# Altium PCB Sensor_Box_Ethernet.PCBDOC
Units mil, origin at the board's own origin, x right, y up, seen from the top; angles counter-clockwise.
Board outline 895.86 x 2876.17 mil, 2 copper layers (Top, Bot), stack 61.855 mil thick; 45 components, 45 nets, 170 pads, 79 vias.
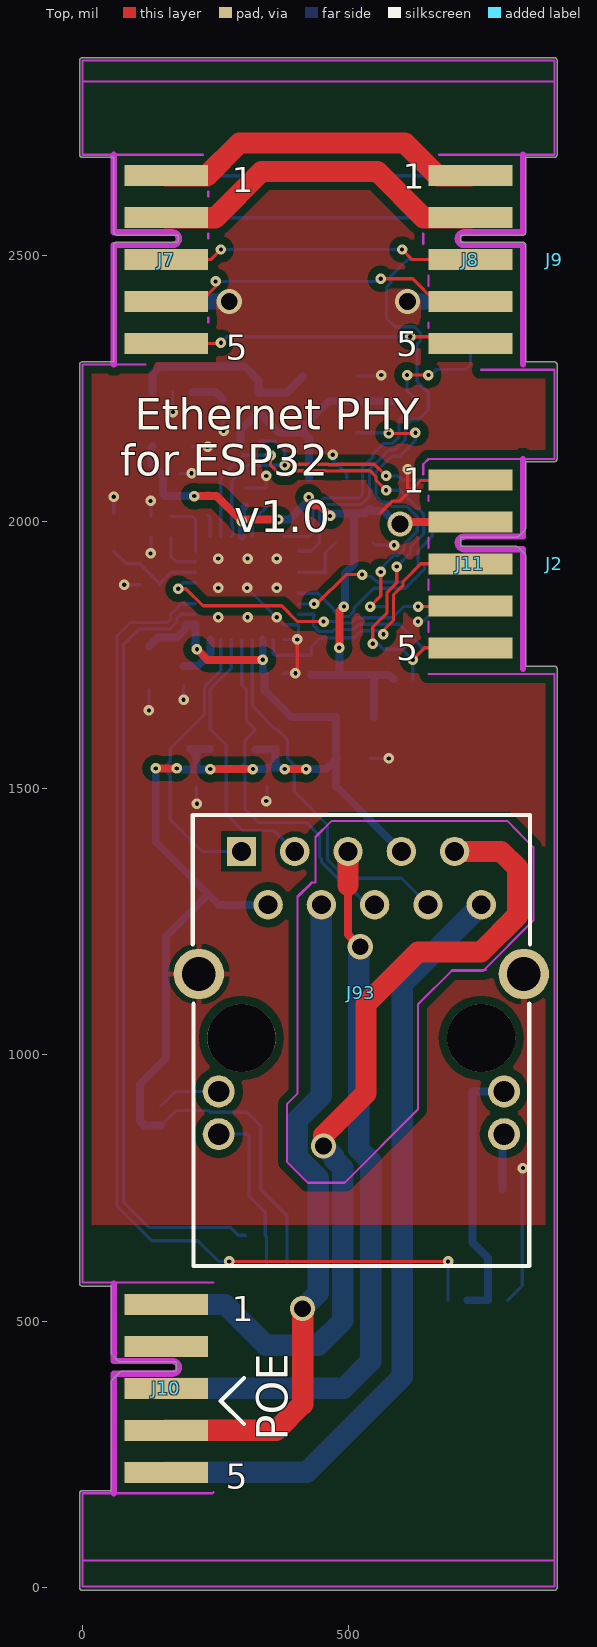
[diagram p0: Top view]
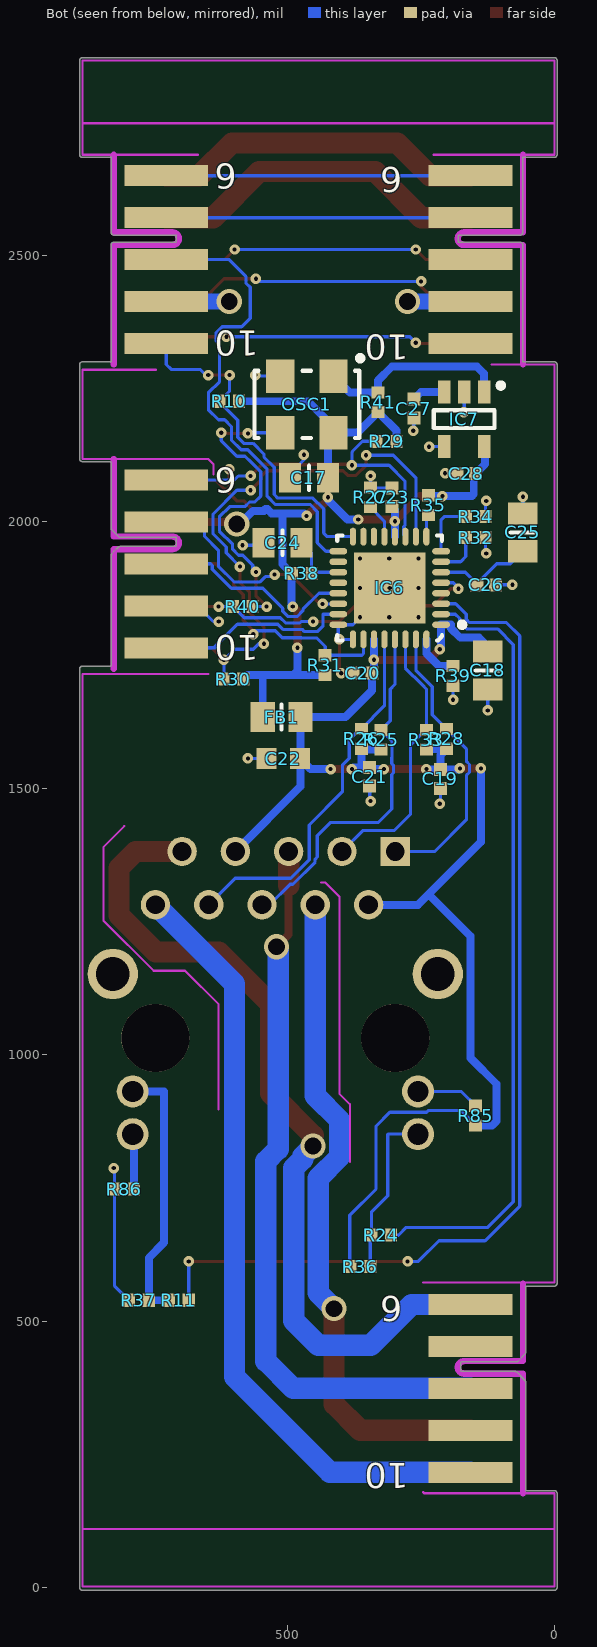
[diagram p1: Bot view, seen from below]
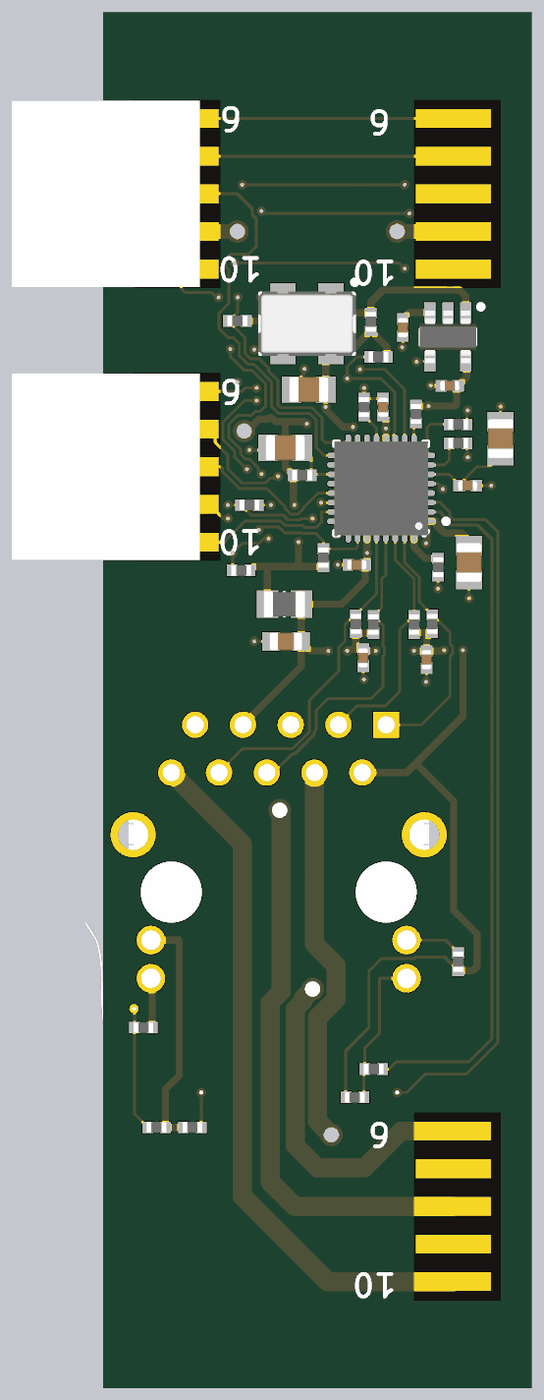
[diagram p2: 3D render of the assembled board from below, using the file's embedded part models]

## Layer stack, top to bottom
TopSolder: solder mask 0.4, Solder Resist, Dk 3.5
Top: signal copper 1.4
Dielectric1: core 59.0551, FR-4, Dk 4.8
Bot: signal copper 1.4
BottomSolder: solder mask 0.4, Solder Resist, Dk 3.5

## Board outline
-4.92,-0.98 cw(c0,0) -5.02,0 -5.02,177.17 cw(c0,177.17) 0,182.18 54.04,182.18 54.04,385.83 cw(c59.05,385.83) 55.53,389.39 55.51,389.37 71.26,405.12 71.24,405.1 cw(c74.8,401.58) 74.8,406.59 176.09,406.59 176.09,424.12 70.87,424.12 cw(c70.87,429.13) 67.3,425.61 67.32,425.59 55.51,437.4 55.53,437.38 cw(c59.05,440.95) 54.04,440.95 54.04,565.85 0,565.85 cw(c0,570.87) -5.02,570.87 -5.02,1724.41 -5.02,2295.27 cw(c0,2295.27) 0,2300.29 59.06,2300.29 59.06,2519.68 cw(c64.07,2519.68) 64.07,2524.7 180.02,2524.7 180.02,2538.29 64.07,2538.29 cw(c64.07,2543.31) 59.06,2543.31 59.06,2683.96 0,2683.96 cw(c0,2688.97) -5.02,2688.97 -5.02,2866.14 cw(c0,2866.14) 0,2871.16 885.83,2871.16 cw(c885.83,2866.14) 890.84,2866.14 890.84,2688.97 cw(c885.83,2688.97) 885.83,2683.96 831.79,2683.96 831.79,2543.31 cw(c826.77,2543.31) 826.77,2538.29 709.74,2538.29 709.74,2524.7 826.77,2524.7 cw(c826.77,2519.69) 831.79,2519.69 cw(c826.77,2519.69) 831.79,2519.64 831.79,2300.29 885.83,2300.29 cw(c885.83,2295.27) 890.84,2295.27 890.84,2118.11 cw(c885.83,2118.11) 885.83,2113.09 831.79,2113.09 831.79,1988.19 cw(c826.77,1988.19) 830.3,1984.62 830.32,1984.64 818.51,1972.83 818.52,1972.85 cw(c814.96,1976.38) 814.96,1971.36 709.74,1971.36 709.74,1953.83 814.96,1953.83 cw(c814.96,1948.82) 818.52,1952.35 818.51,1952.36 826.4,1944.47 830.32,1940.55 830.3,1940.57 cw(c826.77,1937.01) 831.79,1937.01 831.79,1729.42 885.83,1729.42 cw(c885.83,1724.41) 890.84,1724.41 890.84,0 cw(c885.83,0) 885.83,-5.02 0,-5.02 cw(c0,0)

## Design rules (kind name [scope] priority, off if disabled: settings)
Clearance Clearance_DIFF [(InDifferentialPairClass('All Differential Pairs'))] p1: gap=5 ignorepadtopadclearanceinfootprint=FALSE except(0: Arc-Hole Track-Hole SMDPad-Hole THPad-Hole Via-Hole Fill-Hole Poly-Hole Region-Hole Text-Hole; 10: Arc-Poly Track-Poly SMDPad-Poly THPad-Poly Via-Poly Fill-Poly Poly-Poly Poly-Region Poly-Text)
Clearance [All] p2: gap=6 ignorepadtopadclearanceinfootprint=FALSE except(15: Arc-Poly Track-Poly SMDPad-Poly THPad-Poly Via-Poly Fill-Poly Poly-Poly)
DiffPairsRouting [All] p1: maxlimit=10 minlimit=5 mostfreqgap=5 toplayer_minwidth=5 toplayer_maxwidth=15 toplayer_prefwidth=10 bottomlayer_minwidth=5 bottomlayer_maxwidth=15 bottomlayer_prefwidth=10 maxuncoupledlength=500
FabricationTestPointUsage TestPointUsage [All] p1: valid=0 allowmultiple=FALSE
FabricationTestpoint Testpoint [All] p1: side=3 testpointundercomponent=TRUE minsize=40 maxsize=100 preferedsize=60 minholesize=20 maxholesize=40 preferedholesize=32 testpointgrid=1 allowsidetop=TRUE allowsidebottom=TRUE usegrid=TRUE gridtolerance=0.01
HoleSize [All] p1: absolutevalues=TRUE maxlimit=150 minlimit=1 maxpercent=80.000 minpercent=20.000
HoleToHoleClearance [All] p1: gap=1 allowstackedmicrovias=TRUE
MinimumSolderMaskSliver [All] p1: minsoldermaskwidth=0
PlaneClearance [All] p1: clearance=10
PlaneConnect [All] p1: planeconnectstyle=Direct reliefexpansion=20 reliefentries=4 reliefconductorwidth=10 reliefairgap=10
PolygonConnect PolygonConnect_pad [(InPadClass('All Pads'))] p1: connectstyle=Relief reliefconductorwidth=10 reliefentries=4 polygonreliefangle="90 Angle" airgapwidth=10
PolygonConnect [All] p2: connectstyle=Direct reliefconductorwidth=10 reliefentries=4 polygonreliefangle="45 Angle" airgapwidth=10
RoomDefinition Sensor_Box_Ethernet [InComponentClass('Sensor_Box_Ethernet')] p1 off: confinementstyle=ConfineIn formatcopy=TRUE lockcomponents=FALSE outline 1718.49,25.58 8913.36,25.58 8913.36,960.61 1718.49,960.61
RoutingVias [All] p1: holewidth=7.87 width=19.68 viastyle="Through Hole" minholewidth=7.87 minwidth=19.68 maxholewidth=28 maxwidth=50
SilkToSilkClearance [All] p1: silktosilkclearance=0
SilkToSolderMaskClearance SilkscreenOverComponentPads [IsPad] p1: minsilkscreentomaskgap=0 clearancetoexposedcopper=TRUE
SolderMaskExpansion [All] p1: expansion=2
Width [All] p1: maxlimit=50 minlimit=5 preferedwidth=5
20 further rules are at their usual default settings.

## Classes and differential pairs
differential pair PHY_TD: +PHY_TD_P -PHY_TD_N
differential pair PHY_RD: +PHY_RD_P -PHY_RD_N

## Components (designator, comment, footprint, x,y, rotation, side; value= is the part's Value field where it differs from the comment)
C17 "10uF" CAPC2012X135N 460.63,2082.68 r0 bottom
C18 "10uF" CAPC2012X135N 125,1721.14 r270 bottom
C19 "100nF" CAPC1005X55N 213.94,1517.83 r90 bottom
C20 "100nF" CAPC1005X55N 360,1716.14 r180 bottom
C21 "100nF" CAPC1005X55N 346.61,1521.77 r270 bottom
C22 "10nF" CAPC1608X87N 508.62,1555.75 r180 bottom
C23 "100nF" CAPC1005X55N 305,2046.14 r270 bottom
C24 "10uF" CAPC2012X135N 510,1961.14 r180 bottom
C25 "10uF" CAPC2012X135N 59.06,1980.31 r90 bottom
C26 "100nF" CAPC1005X55N 127.95,1881.89 r0 bottom
C27 "100nF" CAPC1005X55N 263.78,2212.6 r90 bottom
C28 "100nF" CAPC1005X55N 165.35,2090.55 r180 bottom
FB1 "220R@100MHz" INDC2012X105N 511.81,1633.86 r0 bottom
IC6 "LAN8710A-EZC" QFN50P500X500X100-33N-S340 309.06,1875.98 r0 bottom
IC7 "BD5230FVE-TR" SOT95P280X145-5N 169.29,2192.91 r270 bottom
J2 "=Family" "AVX_00 9159 010 061 916" 885.83,1921.26 r180 top
J7 "=Family" EDGE10T1B6_P200W1000L0F100X400 157.48,2649.61 r270 top locked
J8 "=Family" EDGE10T5B10_P200W1000L0F100X400 728.35,2334.64 r90 top locked
J9 "=Family" "AVX_00 9159 010 061 916" 885.83,2492.13 r180 top locked
J10 "=Family" EDGE10T1B6_P200W1000L0F100X400 157.48,531.5 r270 top locked
J11 "=Family" EDGE10T5B10_P200W1000L0F100X400 728.35,1763.78 r90 top locked
J93 "RJ45" ABRACON_ARJM11C7-114-BA-EW2 523.62,1031.5 r0 top locked
OSC1 "50MHz" OSCSC254P320X500X130-4N 464.57,2220.47 r270 bottom
R10 "10k" RESC1005X40N 610.24,2226.38 r180 bottom
R11 "330" RESC1005X40N 704.72,539.37 r0 bottom
R24 "330" RESC1005X40N 324.8,661.42 r0 bottom
R25 "49R9" RESC1005X40N 325,1591.14 r90 bottom
R26 "49R9" RESC1005X40N 362.36,1592.64 r90 bottom
R27 "10k" RESC1005X40N 345,2046.14 r90 bottom
R28 "49R9" RESC1005X40N 202.13,1592.64 r270 bottom
R29 "10k" RESC1005X40N 315,2151.14 r180 bottom
R30 "10k" RESC1005X40N 602.36,1704.72 r180 bottom
R31 "10k" RESC1005X40N 430,1731.14 r270 bottom
R32 "10k" RESC1005X40N 147.64,1970.47 r180 bottom
R33 "49R9" RESC1005X40N 240,1591.14 r270 bottom
R34 "10k" RESC1005X40N 147.64,2009.84 r180 bottom
R35 "10k" RESC1005X40N 236.22,2031.5 r90 bottom
R36 "10k" RESC1005X40N 364.17,602.36 r0 bottom
R37 "10k" RESC1005X40N 779.53,539.37 r0 bottom
R38 "10k" RESC1005X40N 474.41,1903.54 r0 bottom
R39 "12k1" RESC1005X40N 190,1711.14 r90 bottom
R40 "10" RESC1005X40N 585,1841.14 r0 bottom
R41 "10k" RESC1005X40N 330.71,2224.41 r90 bottom
R85 "330" RESC1005X40N 147.64,885.83 r90 bottom
R86 "330" RESC1005X40N 807.09,748.03 r180 bottom

## Footprints (in the part's own frame and the unit in brackets; to place one, negate y for a bottom-side part, rotate by r counter-clockwise, add the part's x,y. Pads: shape width x height; smd on the part's side, far side on the other; paste and mask are expansions set on the pad)
ABRACON_ARJM11C7-114-BA-EW2 [mm] "LAN Transformer, body 21.84x15.88mm"
  round 1.4 hole 0.9: 1(5.715,6.35) 2(4.445,8.89) 3(3.175,6.35) 4(1.905,8.89) 5(0.635,6.35) 6(-0.635,8.89) 7(-1.905,6.35) 8(-3.175,8.89) 9(-4.445,6.35)
  rect 1.4x1.4 hole 0.9: 10(-5.715,8.89)
  round 1.52 hole 1.02: L1(-6.8,-2.55) L2(-6.8,-4.58) L3(6.8,-2.55) L4(6.8,-4.58)
  round 3.25 hole 3.25 unplated: MH1(-5.715,0) MH2(5.715,0)
  round 2.4 hole 1.6: S1(-7.745,3.05) S2(7.745,3.05)
  silkscreen extent -8.04,-10.87 8.04,10.63, body extent -10.33,-10.87 10.33,10.63, height 16.15
"AVX_00 9159 010 061 916" [mil] "10 Contacts, 2mm Pitch, Open Ended Card Edge Connector, 9159 Series"
  body extent -197,-195 197,195, height 67
CAPC1005X55N [mm] "Chip Capacitor, Body 1.0x0.55mm, IPC Medium Density"
  rect 0.62x0.62 smd: 1(-0.45,0) 2(0.45,0)
  body extent -0.52,-0.27 0.53,0.28, height 0.55
CAPC1608X87N [mm] "Chip Capacitor, Body 1.6x0.8mm IPC Medium Density"
  rect 0.95x1 smd: 1(-0.8,0) 2(0.8,0)
  body extent -0.87,-0.47 0.88,0.48, height 0.87
CAPC2012X135N [mm] "Chip Capacitor, Body 2.0x1.25mm, IPC Medium Density"
  rect 1.05x1.4 smd: 1(-0.9,0) 2(0.9,0)
  silkscreen extent 0,-0.58 0,0.58, body extent -1.05,-0.67 1.05,0.68, height 1.25
EDGE10T1B6_P200W1000L0F100X400 [mm] "10 contacts Board Edge Connector, First Left Top Pad 1, First Left Bottom Pad 2, Pitch 2mm, Length 0mm, Width 10mm, Finger Lenght 4mm, Finger Width 1mm"
  rect 1x4 smd paste-0.5: 1(0,0) 2(2,0) 3(4,0) 4(6,0) 5(8,0)
  rect 1x4 smd far side paste-0.5: 6(0,0) 7(2,0) 8(4,0) 9(6,0) 10(8,0)
  KeepOutLayer lines w0.3: 9,-2.5 3.3,-2.5 3.3,0.3 ccw(c3,0.3) 2.7,0.3 2.7,-2.5 -1,-2.5
EDGE10T5B10_P200W1000L0F100X400 [mm] "10 contacts Board Edge Connector, First Left Top Pad 5, First Left Bottom Pad 10, Pitch 2mm, Length 0mm, Width 10mm, Finger Lenght 4mm, Finger Width 1mm"
  rect 1x4 smd paste-0.5: 1(8,0) 2(6,0) 3(4,0) 4(2,0) 5(0,0)
  rect 1x4 smd far side paste-0.5: 6(8,0) 7(6,0) 8(4,0) 9(2,0) 10(0,0)
  KeepOutLayer lines w0.3: -1,-2.5 4.7,-2.5 4.7,0.3 cw(c5,0.3) 5.3,0.3 5.3,-2.5 9,-2.5
INDC2012X105N [mm] "Chip Inductor, EIA 0805, Metric 2012, Body 2.0x1.25mm, IPC Medium Density"
  rect 1.15x1.45 smd: 1(-0.9,0) 2(0.9,0)
  silkscreen extent 0,-0.6 0,0.6, body extent -1.1,-0.7 1.1,0.7, height 1.1
OSCSC254P320X500X130-4N [mm] "Oscillator, Side Concave; 2.54mm Pitch; 4 pin, 3.20mm L X 5.00mm W X 1.30mm H, IPC Medium Density"
  rect 1.6x1.35 smd: 1(-1.35,1.27) 2(-1.35,-1.27) 3(1.35,-1.27) 4(1.35,1.27)
  silkscreen extent -2.32,-2.5 1.6,2.67, body extent -1.7,-2.6 1.7,2.6, height 1.3
QFN50P500X500X100-33N-S340 [mm] "QFN, 0.50mm Pitch, Square; 32 Pin, 5.00mm L X 5.00mm W X 1.00mm H body (w/thermal tab 3.4 X 3.4mm),  IPC Medium Density"
  oval 0.85x0.3 smd: 1(-2.45,1.75) 2(-2.45,1.25) 3(-2.45,0.75) 4(-2.45,0.25) 5(-2.45,-0.25) 6(-2.45,-0.75) 7(-2.45,-1.25) 8(-2.45,-1.75) 17(2.45,-1.75) 18(2.45,-1.25) 19(2.45,-0.75) 20(2.45,-0.25) 21(2.45,0.25) 22(2.45,0.75) 23(2.45,1.25) 24(2.45,1.75)
  oval 0.3x0.85 smd: 9(-1.75,-2.45) 10(-1.25,-2.45) 11(-0.75,-2.45) 12(-0.25,-2.45) 13(0.25,-2.45) 14(0.75,-2.45) 15(1.25,-2.45) 16(1.75,-2.45) 25(1.75,2.45) 26(1.25,2.45) 27(0.75,2.45) 28(0.25,2.45) 29(-0.25,2.45) 30(-0.75,2.45) 31(-1.25,2.45) 32(-1.75,2.45)
  rect 3.4x3.4 smd: 33(0,0)
  silkscreen extent -3.57,-2.5 2.5,2.5, body extent -2.5,-2.5 2.5,2.5, height 1
RESC1005X40N [mm] "Chip Resistor, EIA 0402, Metric 1005, Body 1.0x0.5mm, IPC Medium Density"
  rect 0.58x0.62 smd: 1(-0.47,0) 2(0.47,0)
  body extent -0.52,-0.27 0.53,0.28, height 0.4
SOT95P280X145-5N [mm] "SOT, 0.95mm pitch; 5 pin, 1.60mm W X 2.90mm L X 1.45mm H body, IPC Medium Density"
  rect 1.1x0.6 smd: 1(-1.3,0.95) 2(-1.3,0) 3(-1.3,-0.95) 4(1.3,-0.95) 5(1.3,0.95)
  silkscreen extent -1.72,-1.45 0.43,1.87, body extent -1.4,-1.5 1.4,1.5, height 1.45

## Part data
C17 C18 C24 C25: library part CC0805_10UF_16V_10%_X5R, "Non-polarised capacitor", Case=0805, Manufacturer=GENERIC, Manufacturer1 ComponentHeight=1.4mm, Manufacturer1 Example=KEMET, Manufacturer1 Part Number=C0805C106K4PAC, Tolerance=±10%, Voltage=16V, Author="CERN DEM JLC", Component Type=Standard, CreateDate=03.12.2007, HelpURL=\\cern.ch\dfs\Applications\Altium\Datasheets\CC1206_X5R_KEMET.pdf, LatestRevisionDate=03.12.2007, Manufacturer Part Number=CC0805_10UF_16V_10%_X5R, Mounted=Yes, Part Description="SMD Multilayer Chip Ceramic Capacitor", Part Number=CC0805_10UF_16V_10%_X5R, Pin Count=2, Sense=No, SMD=Yes, Socket=No, Status=Preferred, TC=X5R
C19 C20 C21 C23 C26 C27 C28: library part CC0402_100NF_16V_10%_X5R, "Non-polarised capacitor", Case=0402, Manufacturer=GENERIC, Manufacturer1 ComponentHeight=0.55mm, Manufacturer1 Example=MURATA, Manufacturer1 Part Number=GRM155R61C104KA88D, Tolerance=±10%, Voltage=16V, Author="CERN DEM JLC", Component Type=Standard, CreateDate=10.12.2013, HelpURL=\\cern.ch\dfs\Applications\Altium\Datasheets\CC0402_X5R_MURATA_GRM.pdf, LatestRevisionDate=10.12.2013, Manufacturer Part Number=CC0402_100NF_16V_10%_X5R, Mounted=Yes, Part Description="SMD Multilayer Chip Ceramic Capacitor", Part Number=CC0402_100NF_16V_10%_X5R, Pin Count=2, Sense=No, SMD=Yes, Socket=No, Status=None, TC=X5R
C22: library part CC0603_10NF_50V_5%_C0G, "Non-polarised capacitor", Case=0603, Manufacturer=GENERIC, Manufacturer1 ComponentHeight=0.9mm, Manufacturer1 Example=TDK, Manufacturer1 Part Number=C1608C0G1H103J080AA, Tolerance=±5%, Voltage=50V, Author="CERN DEM JLC", Component Type=Standard, CreateDate=10.12.2014, HelpURL=\\cern.ch\dfs\Applications\Altium\Datasheets\CC0603_C0G_TDK_C.pdf, LatestRevisionDate=10.12.2014, Manufacturer Part Number=CC0603_10NF_50V_5%_C0G, Mounted=Yes, Part Description="SMD Multilayer Chip Ceramic Capacitor", Part Number=CC0603_10NF_50V_5%_C0G, Pin Count=2, Sense=No, SMD=Yes, Socket=No, Status=Preferred, TC=C0G/NP0
FB1: library part IND0805_MURATA_BLM21PG221SN1D, "Inductor", Case=0805, Manufacturer=MURATA, Manufacturer Part Number=BLM21PG221SN1D, Power=2A, Resistance=0.05R, Tolerance=±25%, Author="CERN DEM JLC", ComponentHeight=1.05mm, Component Type=Standard, CreateDate=2010-01-25, HelpURL=\\cern.ch\dfs\Applications\Altium\Datasheets\IND0402_MURATA_BLM21P.pdf, LatestRevisionDate=2010-01-25, Mounted=Yes, Part Description="SMD EMIFIL Suppression Chip Ferrite Bead", Part Number=IND0805_MURATA_BLM21PG221SN1D, Pin Count=2, SMD=Yes, Socket=No, Status=None, Table="Inductors SMD"
IC6: "Small Footprint MII/RMII 10/100 Ethernet Transceiver with HP Auto-MDIX and flexPWR® Technology", Case=QFN32, Manufacturer="MICROCHIP TECHNOLOGY", Author="CERN DEM MR", Bonding=No, ComponentHeight=1mm, Component Type=Standard, CreateDate=13.02.2018, Device=LAN8710A-EZC, HelpURL=\\cern.ch\dfs\Applications\Altium\Datasheets\LAN8710A-EZC.pdf, LatestRevisionDate=13.02.2018, Manufacturer Part Number=LAN8710A-EZC, Mounted=Yes, PackageDescription="QFN, 0.50mm Pitch,square; 8 pin X 8 pin, 5mm X 5mm X 1.00mm H body (w/thermal tab 3.40 X 3.40mm),  IPC Medium Density", Part Description="Small Footprint MII/RMII 10/100 Ethernet Transceiver with HP Auto-MDIX and flexPWR® Technology", Part Number=LAN8710A-EZC, Pin Count=33, PressFit=No, Sense=No, SMD=Yes, Socket=No
IC7: "Free Delay Time Setting  CMOS Voltage Detector", Case=SOT23-5, Manufacturer=Rohm, Author=GK, Bonding=No, ComponentHeight=1.45mm, Component Type=Standard, CreateDate=02.03.2015, Device=BD5230FVE-TR, HelpURL=\\cern.ch\dfs\Applications\Altium\Datasheets\TPS3808G50DBVT.pdf, LatestRevisionDate=02.03.2015, Manufacturer Part Number=BD5230FVE-TR, Mounted=Yes, PackageDescription="SOT23, 5-Leads, Body 1.6x3.0mm, Pitch 0.95mm, IPC Medium Density", Part Description="5V, Low Quiescent Current, Programmable-Delay Supervisory Circuit", Part Number=BD5230FVE-TR, Pin Count=5, PressFit=No, Sense=No, SMD=Yes, Socket=No
J2 J9: library part "AVX_00 9159 010 061 916", "Open Ended Card Edge Connector, 9159 Series", Manufacturer=AVX, Manufacturer Part Number="00 9159 010 061 916", Author="CERN DEM MR", ComponentHeight=1.6mm, Component Type=Standard, CreateDate=13.02.2018, HelpURL="\\cern.ch\dfs\Applications\Altium\Datasheets\AVX_00 9159 010 061 916.pdf", LatestRevisionDate=13.02.2018, Mounted=Yes, Part Description="10 Contacts, 2mm Pitch, Open Ended Card Edge Connector, 9159 Series", Part Number="AVX_00 9159 010 061 916", Pin Count=10, PressFit=No, Sense=No, SMD=No, Socket=No, Status=None
J7 J10: library part EDGE10T1B6_P200W1000L0F100X400, "PCB Edge Connector 10 (2x5)", Author="CERN DEM MR", ComponentHeight=0mm, Component Type="Standard (No BOM)", CreateDate=14.02.2018, HelpURL=\\cern.ch\dfs\Applications\Altium\Datasheets\EDGE10T1B6_P200W1000L0F100X400.pdf, LatestRevisionDate=14.02.2018, Mounted=No, Part Description="10 Contacts Board Edge Connector, Pitch 2mm, Length 0mm, Width 10mm, Finger Lenght 4mm, Finger Width 1mm", Part Number=EDGE10T1B6_P200W1000L0F100X400, Pin Count=10, PressFit=No, Sense=No, SMD=No, Socket=No, Status=None
J8 J11: library part EDGE10T5B10_P200W1000L0F100X400, "PCB Edge Connector 10 (2x5)", Author="CERN DEM MR", ComponentHeight=0mm, Component Type="Standard (No BOM)", CreateDate=14.02.2018, HelpURL=\\cern.ch\dfs\Applications\Altium\Datasheets\EDGE10T5B10_P200W1000L0F100X400.pdf, LatestRevisionDate=14.02.2018, Mounted=No, Part Description="10 Contacts Board Edge Connector, Pitch 2mm, Length 0mm, Width 10mm, Finger Lenght 4mm, Finger Width 1mm", Part Number=EDGE10T5B10_P200W1000L0F100X400, Pin Count=10, PressFit=No, Sense=No, SMD=No, Socket=No, Status=None
J93: "MagJack 10/100BaseT, PoE+, 1X1, OG/Y, -40 to 85*C, Tab Up, RoHS", Manufacturer=Abracon, Manufacturer Part Number=ARJM11C7-114-BA-EW2, Author=GK, ComponentHeight=13.61mm, Component Type=Standard, CreateDate=05.11.2012, Family=RJ45, HelpURL=\\cern.ch\dfs\Applications\Altium\Datasheets\BELFUSE_0826-1X1T-GJ-F.pdf, LatestRevisionDate=05.11.2012, Mounted=Yes, Part Description="1 Port, Orange Green/Yellow LEDs, RJ45 10/100BaseT, PoE, Ethernet MagJack® Connector Module", Part Number=ARJM11C7-114-BA-EW2, Pin Count=18, PressFit=No, Sense=No, SMD=No, Socket=No, Status=None
OSC1: library part OSC_50MHZ_CTS_636L3I050M00000, "Oscillator 4 pins 1=OE 2=GND 3=OUT 4=VCC", Manufacturer="CTS ELECTRONIC COMPONENTS", Manufacturer Part Number=636L3I050M00000, Author="CERN DEM JMW", Bonding=No, ComponentHeight=1.3mm, Component Type=Standard, CreateDate=22.09.2015, HelpURL=\\cern.ch\dfs\Applications\Altium\Datasheets\OSC_CTS_636.pdf, LatestRevisionDate=22.09.2015, Mounted=Yes, PackageDescription="Oscillator, Side Concave; 2.54mm Pitch; 4 pin, 3.20mm L X 5.00mm W X 1.30mm H, IPC Medium Density", Part Description="3.3V, ±50ppm, 30pF, -40..85°C, HCMOS/TTL Clock Oscillator, 636 Series", Part Number=OSC_50MHZ_CTS_636L3I050M00000, Pin Count=4, PressFit=No, Sense=No, SMD=Yes, Socket=No
R10 R27 R29 R30 R31 R32 R34 R35 R36 R37 R38 R41: library part R0402_10K_1%_0.0625W_100PPM, "Resistor - 1%", Case=0402, Manufacturer=GENERIC, Manufacturer1 ComponentHeight=0.4mm, Manufacturer1 Example="YAGEO PHYCOMP", Manufacturer1 Part Number=232270671003L, Power=0.0625W, Tolerance=±1%, Author="CERN DEM JLC", Component Type=Standard, CreateDate=2007-12-03, HelpURL=\\cern.ch\dfs\Applications\Altium\Datasheets\R0402_Phycomp_RC0402.pdf, LatestRevisionDate=2012-10-17, Manufacturer Part Number=R0402_10K_1%_0.0625W_100PPM, Mounted=Yes, Part Description="General Purpose Thick Film Chip Resistor", Part Number=R0402_10K_1%_0.0625W_100PPM, Pin Count=2, SMD=Yes, Socket=No, Status="Not recommended", Table="Resistors SMD", TC=±100ppm/°C
R11 R24 R85 R86: library part R0402_330R_1%_0.0625W_100PPM, "Resistor - 1%", Case=0402, Manufacturer=GENERIC, Manufacturer1 ComponentHeight=0.4mm, Manufacturer1 Example="YAGEO PHYCOMP", Manufacturer1 Part Number=232270673301L, Power=0.0625W, Tolerance=±1%, Author="CERN DEM JLC", Component Type=Standard, CreateDate=03.12.2007, HelpURL=\\cern.ch\dfs\Applications\Altium\Datasheets\R0402_Phycomp_RC0402.pdf, LatestRevisionDate=17.10.2012, Manufacturer Part Number=R0402_330R_1%_0.0625W_100PPM, Mounted=Yes, Part Description="General Purpose Thick Film Chip Resistor", Part Number=R0402_330R_1%_0.0625W_100PPM, Pin Count=2, PressFit=No, Sense=No, SMD=Yes, Socket=No, Status="Not Recommended", TC=±100ppm/°C
R25 R26 R28 R33: library part R0402_49R9_1%_0.0625W_100PPM, "Resistor - 1%", Case=0402, Manufacturer=GENERIC, Manufacturer1 ComponentHeight=0.4mm, Manufacturer1 Example="YAGEO PHYCOMP", Manufacturer1 Part Number="232270674999L or RC0402FR-0749R9L", Power=0.0625W, Tolerance=±1%, Author="CERN DEM JLC", Component Type=Standard, CreateDate=2012-10-24, HelpURL=\\cern.ch\dfs\Applications\Altium\Datasheets\R0402_Phycomp_RC0402.pdf, LatestRevisionDate=2012-10-24, Manufacturer Part Number=R0402_49R9_1%_0.0625W_100PPM, Mounted=Yes, Part Description="General Purpose Thick Film Chip Resistor", Part Number=R0402_49R9_1%_0.0625W_100PPM, Pin Count=2, SMD=Yes, Socket=No, Status="Not recommended", Table="Resistors SMD", TC=±100ppm/°C
R39: library part R0402_12K1_1%_0.0625W_100PPM, "Resistor - 1%", Case=0402, Manufacturer=GENERIC, Manufacturer1 ComponentHeight=0.4mm, Manufacturer1 Example="YAGEO PHYCOMP", Manufacturer1 Part Number="232270671213L or RC0402FR-0712K1L", Power=0.0625W, Tolerance=±1%, Author="CERN DEM JLC", Component Type=Standard, CreateDate=2012-10-24, HelpURL=\\cern.ch\dfs\Applications\Altium\Datasheets\R0402_Phycomp_RC0402.pdf, LatestRevisionDate=2012-10-24, Manufacturer Part Number=R0402_12K1_1%_0.0625W_100PPM, Mounted=Yes, Part Description="General Purpose Thick Film Chip Resistor", Part Number=R0402_12K1_1%_0.0625W_100PPM, Pin Count=2, SMD=Yes, Socket=No, Status="Not recommended", Table="Resistors SMD", TC=±100ppm/°C
R40: library part R0402_10R_1%_0.0625W_200PPM, "Resistor - 1%", Case=0402, Manufacturer=GENERIC, Manufacturer1 ComponentHeight=0.4mm, Manufacturer1 Example="YAGEO PHYCOMP", Manufacturer1 Part Number=232270671009L, Power=0.0625W, Tolerance=±1%, Author="CERN DEM JLC", Component Type=Standard, CreateDate=24.06.2009, HelpURL=\\cern.ch\dfs\Applications\Altium\Datasheets\R0402_Phycomp_RC0402.pdf, LatestRevisionDate=17.10.2012, Manufacturer Part Number=R0402_10R_1%_0.0625W_200PPM, Mounted=Yes, Part Description="General Purpose Thick Film Chip Resistor", Part Number=R0402_10R_1%_0.0625W_200PPM, Pin Count=2, PressFit=No, Sense=No, SMD=Yes, Socket=No, Status="Not Recommended", TC=±200ppm/°C

## Via types
v1: diameter 19.68, hole 7.87, Top to Bot, tented both sides, 72 vias
v2: diameter 47.24, hole 31.5, Top to Bot, tented both sides, 6 vias
v3: diameter 19.68, hole 7.87, Top to Bot, 1 vias

## Nets (pads, with @x,y where several pads share a name; then routed paths per layer and width w, separated by ;. In a path a pad name is that pad's centre, name@x,y a point inside that pad or via, vN(x,y) a via of type N, cw(c..) or ccw(c..) an arc to the next point about the centre after c; other vN are vias at no path point)
AVDDT_PHY: C18.1 C19.2 C20.2 C21.1 C22.2 FB1.1 IC6.1 IC6.27 J93.4 J93.9 R25.1 R26.1 R28.2 R33.2 R36.2 R85.1 | length 2765.2
  Top w15: v1(137.8,1537.4) v1(177.17,1537.4) ; v1(215,1761.14) 235,1741.14 v1(338.58,1741.14) ; v1(240,1536.14) v1(320,1536.14) ; v1(380,1536.14) v1(420,1536.14)
  Bot w6: R85.1 175.98,895.67 236.3,895.67 239.78,892.18 308.61,892.18 334.65,866.14 334.65,748.03 383.86,698.82 R36.2@383.86,602.36
  Bot w15: C18.1@125,1766.57 141.07,1782.64 176.58,1782.64 194,1800.06 194,1807.09 IC6.1 212.6,1763.54 v1(215,1761.14) ; v1(137.8,1537.4) 137.8,1399.6 236.22,1301.18 ; R85.1 116.93,867.32 108.27,875.98 108.27,944.88 157.48,994.09 157.48,1222.44 236.22,1301.18 ; v1(177.17,1537.4) 179.01,1535.55 C19.2 ; v1(240,1536.14) 239.41,1535.55 C19.2 ; R33.2@240,1574.13 R28.2 213.94,1562.32 C19.2 ; v1(320,1536.14) 343.27,1536.14 C21.1 C21.1@353.35,1539.49 ; R25.1 360.86,1572.64 R26.1 362.36,1548.5 C21.1@353.35,1539.49 ; IC6.27 v1(338.58,1741.14) 338.58,1719.84 C20.2 342.28,1683.76 392.18,1633.86 FB1.1 C22.2@476.38,1555 ; J93.9 255.9,1281.5 236.22,1301.18 ; v1(380,1536.14) 376.65,1539.49 C21.1@353.35,1539.49 ; v1(420,1536.14) 457.52,1536.14 C22.2@476.38,1555 ; C22.2 C22.2@476.38,1555 ; J93.4 476.38,1503.74 C22.2@476.38,1555
CLK: IC6.5 J11.4 R40.2 | length 626.5
  Top w6: v1(180.02,1874.52) 194.38,1874.52 226.38,1842.52 374.02,1842.52 403.55,1812.99 v1(452.76,1812.99) ; v1(630,1841.14) 726.97,1841.14 J11.4
  Bot w6: v1(180.02,1874.52) 180.02,1876.16 189.69,1885.83 IC6.5 ; v1(452.76,1812.99) 475.36,1812.99 478.05,1810.3 504.46,1810.3 514.1,1819.94 581.64,1819.94 602.85,1841.14 R40.2 v1(630,1841.14)
GND: C17.2 C18.2 C19.1 C20.1 C21.2 C22.1 C23.1 C24.1 C25.2 C26.1 C27.1 C28.1 IC6.24 IC6.25 IC6.33 IC7.2 IC7.4 J7.9 J8.9 J11.1 J11.9 J93.S1 J93.S2 OSC1.2 R27.2 R32.2 R34.2 R37.2 R39.1 R86.1 | length 1709.1
  Top w6: v1(400,1716.14) 403.39,1719.53 v1(403.39,1779.53) ; 560.31,2016.89 582.78,2039.37 596.18,2039.37 610.24,2053.43 610.24,2061.44 ; v1(610.24,2098.42) 610.24,2061.44 ; J11.1 728.35,2077.61 635.22,2077.61 619.05,2061.44 610.24,2061.44
  Bot w6: C25.2 v1(59.06,2047.24) ; v1(78.74,1881.89) C26.1 ; v1(125,1646.14) C18.2 ; v1(127.95,1940.94) 129.13,1942.12 R32.2 ; v1(127.95,2039.37) 129.13,2038.19 R34.2 ; IC7.2 169.29,2206.85 v1(170,2206.14) ; C28.1 204.41,2090.55 v1(205,2091.14) ; v1(190,1666.14) R39.1 ; IC7.4 234.41,2141.73 v1(235,2141.14) ; C19.1 213.94,1472.2 v1(215,1471.14) ; C27.1 263.78,2172.36 v1(265,2171.14) ; C23.1 344.21,2063.86 R27.2 v1(345,2086.14) ; v1(309.06,1875.98) 377.95,1807.09 IC6.24 405.51,1781.65 v1(403.39,1779.53) IC6.25 ; v1(345,1476.14) 346.61,1477.75 C21.2 ; C20.1 v1(400,1716.14) ; v1(470,2126.14) 470,2116.14 496.06,2090.08 C17.2 ; OSC1.2 559.06,2273.62 v1(561.02,2275.59) ; C22.1 574.61,1555.75 v1(575,1556.14) ; C24.1 550.43,1956.14 v1(585,1956.14) ; v1(629.92,1812.99) 639.76,1812.99 669.29,1842.52 J11.9 ; R37.2 825.59,566.93 R86.1 825.59,786.22 v3(826.77,787.4)
  Bot w30: J7.9 v2(275.59,2413.38) ; v2(610.24,2413.38) J8.9
  other v1: 255,1821.14 310,1821.14 365,1821.14 255,1876.14 365,1876.14 255,1931.14 310,1931.14 365,1931.14
GSM_PWR: J7.7 J8.7 | length 570.9
  Bot w6: J7.7 J8.7
LED1: J93.L3 R11.2 R37.1 | length 500.5
  Bot w15: R11.2 R37.1 761.02,618.9 732.28,647.63 732.28,931.1 J93.L3
LED2: J93.L2 R24.2 R36.1 | length 319
  Bot w6: J93.L2 312.2,851.18 312.8,850.58 312.8,735.19 343.31,704.68 R24.2 345.67,659.05 R36.1
MDC: IC6.17 J8.8 | length 907.4
  Bot w6: IC6.17 428.74,1944.88 444.9,1961.04 444.9,2019.37 458.17,2032.64 523.95,2032.64 539.16,2047.84 539.16,2098.92 556.87,2116.63 575.54,2135.3 587.78,2135.3 606.16,2153.68 606.16,2178.95 618.84,2191.63 630.34,2191.63 649.16,2210.44 649.16,2242.31 628.29,2263.17 628.29,2333.34 634.39,2339.43 634.39,2355.04 623.35,2366.08 587.03,2366.08 570.87,2382.25 570.87,2440.36 578.84,2448.34 578.84,2460.73 610.24,2492.12 J8.8
MDIO: IC6.16 J8.10 R10.1 | length 658.5
  Top w6: v1(609.45,2275.59) v1(649.6,2275.59)
  Bot w6: IC6.16 426.3,1972.44 432.9,1979.04 432.9,2024.34 453.19,2044.64 518.98,2044.64 525.73,2051.39 525.73,2102.46 544.87,2121.6 544.87,2126.83 565.34,2147.3 582.8,2147.3 594.16,2158.65 594.16,2190.61 628.74,2225.2 R10.1 609.45,2245.67 v1(609.45,2275.59) ; v1(649.6,2275.59) 654.45,2275.59 665,2286.14 719.21,2286.14 728.35,2295.27 J8.10
NetC24_2: C24.2 IC6.19 R38.1 | length 116.5
  Bot w6: IC6.19 453.94,1905.51 R38.1 455.91,1942.48 C24.2
NetC27_2: C27.2 IC7.3 | length 62.8
  Bot w15: IC7.3 250,2244.09 C27.2
NetIC6_2: IC6.2 R24.1 | length 1463.8
  Bot w6: IC6.2 185.63,1826.77 177.5,1818.64 177.5,1812.17 164.47,1799.14 106.61,1799.14 77,1769.53 77,724.14 125,676.14 277.85,676.14 292.58,661.42 R24.1
NetIC6_3: IC6.3 R11.1 | length 1985.3
  Top w6: v1(275.59,612.2) v1(686.22,612.2)
  Bot w6: IC6.3 185.32,1846.46 165.5,1826.64 165.5,1817.14 159.5,1811.14 90,1811.14 65,1786.14 65,716.14 130,651.14 216.54,651.14 255.47,612.2 v1(275.59,612.2) ; R11.1 v1(686.22,612.2)
NetIC6_7: IC6.7 R32.1 | length 86
  Bot w6: R32.1 166.14,1935.04 175.98,1925.2 IC6.7
NetIC6_8: IC6.8 R34.1 | length 108
  Bot w6: R34.1 206.69,2009.84 212.6,2003.94 IC6.8
NetIC6_9: IC6.9 R35.1 | length 42.2
  Bot w6: R35.1 240.16,2009.06 IC6.9
NetIC6_13: IC6.13 R27.1 | length 66
  Bot w6: IC6.13 318.9,2001.53 R27.1
NetIC6_32: IC6.32 R39.2 | length 86.2
  Bot w15: R39.2 216.52,1729.64 240.16,1753.29 IC6.32
NetJ93_L1: J93.L1 R85.2 | length 119.4
  Bot w6: R85.2 174.41,931.1 J93.L1
NetJ93_L4: J93.L4 R86.2 | length 104.3
  Bot w15: R86.2 788.58,848.43 J93.L4
NetOSC1_3: OSC1.3 R40.1 | length 612.4
  Top w6: v1(540,1841.14) 560,1861.14 v1(560,1906.14) ; v1(575,2166.14) 630,2166.14 628.82,2167.32 v1(625,2167.32)
  Bot w6: OSC1.3 v1@575,2167.32 ; v1(540,1841.14) R40.1 ; v1(560,1906.14) 565,1906.14 566.16,1907.3 566.16,1918.95 584.51,1937.3 592.8,1937.3 603.84,1948.34 603.84,1957.86 628.61,1982.63 628.61,2009.65 609.5,2028.76 580.71,2028.76 572.18,2037.3 562.2,2037.3 551.16,2048.34 551.16,2093.95 568.87,2111.66 580.51,2123.3 595.74,2123.3 625,2152.56 v1(625,2167.32)
OSC_DIS: IC7.1 OSC1.1 R41.2 | length 367.9
  Bot w15: IC7.1 131.89,2278.03 145,2291.14 305,2291.14 330.71,2265.43 R41.2 383.86,2242.91 OSC1.1
P3V3: C17.1 C23.2 C28.2 FB1.2 IC6.12 IC7.5 J11.2 OSC1.4 R10.2 R29.2 R30.2 R31.2 R35.2 R38.2 R41.1 | length 1870.4
  Top w15: v1(210,2048.5) 251.85,2048.5 v1(299.21,2001.14) 302.56,2004.48 v1(367.87,2004.48) ; v1(425,2046.14) 425,2041.53 435.39,2031.14 445,2031.14 v1(465,2011.14) ; v1(482.28,1763.78) 482.28,1832.6 v1(490.83,1841.14) ; v2(595.98,1996.14) 600,1996.14 610,2006.14 616.14,2000 J11.2
  Bot w15: IC7.5 130,2139.84 130,2108.19 C28.2 151.3,2086.89 151.3,2051.88 154.67,2048.5 v1(210,2048.5) 234.72,2048.5 R35.2 ; R29.2 296.5,2171.69 R41.1 369.29,2167.32 OSC1.4 ; IC6.12 v1(299.21,2001.14) 299.21,2022.64 C23.2 ; v1(367.87,2004.48) 388.34,2004.48 425,2041.14 v1(425,2046.14) ; C17.1 425.2,2156.69 OSC1.4 ; R31.2 490,1712.64 ; v1(465,2011.14) 470,2016.14 510,2016.14 ; v1(482.28,1763.78) 482.28,1720.35 490,1712.64 ; v1(490.83,1841.14) 492.91,1839.05 R38.2 510,1920.63 510,2016.14 ; FB1.2 547.24,1709.88 550,1712.64 ; R30.2 575.95,1712.64 550,1712.64 ; R10.2 462.6,2226.38 414.57,2178.34 OSC1.4 ; v2(595.98,1996.14) 590,1996.14 565.34,2020.8 545.36,2020.8 542.11,2024.05 538.7,2024.05 530.79,2016.14 510,2016.14 ; 490,1712.64 550,1712.64
P5V0: J7.1 J8.1 | length 621.8
  Top w40: J7.1 233.47,2649.61 295,2711.14 605,2711.14 666.54,2649.6 J8.1
P12V0: J7.2 J8.2 | length 642.6
  Top w40: J7.2 249.73,2570.87 336.34,2657.48 553.66,2657.48 640.28,2570.86 J8.2
PHY_RD_N: IC6.28 J93.3 R26.2 | length 697.1
  Bot w6: IC6.28 318.9,1654.61 R26.2 365,1611.14 385,1591.14 385,1556.37 397.84,1543.53 397.84,1493.3 460,1431.14 460,1366.14 495,1331.14 598.98,1331.14 J93.3
PHY_RD_P: IC6.29 J93.5 R25.2 | length 684.6
  Bot w6: IC6.29 299.21,1694.83 307.9,1686.14 307.9,1626.75 R25.2 304.8,1589.44 304.8,1557.7 305,1557.5 305,1546.37 302.16,1543.53 302.16,1528.75 305,1525.91 305,1461.14 330,1436.14 420,1436.14 445,1411.14 445,1371.14 449,1367.14 449,1361.58 490.44,1320.14 496,1320.14 534.64,1281.5 J93.5
PHY_TD_N: IC6.30 J93.8 R33.1 | length 516.2
  Bot w6: IC6.30@280,1779.06 IC6.30 279.53,1725.67 248.11,1694.25 240,1686.14 R33.1 241.5,1609.64 270,1581.14 270,1451.14 300,1421.14 358.98,1421.14 J93.8
PHY_TD_P: IC6.31 J93.10 R28.1 | length 540.7
  Bot w6: IC6.31 259.84,1721.54 229,1690.7 229,1638.02 R28.1 165,1574.02 165,1550.47 159.32,1544.79 159.32,1530.01 165,1524.33 165,1441.14 224.64,1381.5 J93.10
POE_VC1: J10.4 J93.7 | length 1260.8
  Top w40: J10.4 364.17,295.28 413.39,344.49 v2(413.39,523.62)
  Bot w40: v2(413.39,523.62) 442.91,553.15 442.91,768.4 403.13,808.18 403.13,877.54 448.62,923.03 J93.7
POE_VC1+: J10.3
POE_VC1-: J10.5
POE_VC2: J10.6 J93.2 | length 1578.5
  Top w40: v2@452.76,848.42 532.26,927.93 532.26,1095.25 629.92,1192.91 748.03,1192.91 816.93,1261.81 816.93,1350.39 785.83,1381.5 J93.2
  Bot w40: J10.6 267.71,531.5 344.49,454.72 442.91,454.72 488.91,500.72 488.91,787.46 472.44,803.93 472.44,809.05 v2(452.76,828.74)
POE_VC3: J10.8 J93.6 | length 1381.7
  Top w15: 498.62,1317.52 498.62,1225.79 v2(521.65,1202.75)
  Top w40: 498.62,1317.52 J93.6
  Bot w40: J10.8 490.16,374.02 541.34,425.2 541.34,800.09 518.44,822.99 518.44,1199.54 v2(521.65,1202.75)
POE_VC4: J10.10 J93.1 | length 1464.3
  Bot w40: J10.10 421.26,216.54 600.39,395.67 600.39,1133.27 J93.1
RX_DV: IC6.26 J11.3 R31.1 | length 524.1
  Top w6: v1(565,1789.09) 565,1796.14 584,1815.14 584,1863.17 602,1881.17 602,1888.14 635.12,1921.26 J11.3
  Bot w6: IC6.26 358.27,1752.87 361.5,1749.64 R31.1 430,1766.14 446.01,1782.15 474,1782.15 474.48,1782.62 510.73,1782.62 523.75,1795.64 564.5,1795.64 565,1795.14 v1(565,1789.09)
RXD0: IC6.11 J11.6 R29.1 | length 660
  Top w6: v1(380,2106.14) 382,2108.14 461.35,2108.14 462.2,2107.3 477.8,2107.3 478.65,2108.14 548,2108.14 v1(570,2086.14)
  Bot w6: IC6.11 282.71,1975.63 282.71,1990.99 280.37,1993.34 280.37,2076.36 310.15,2106.14 323.35,2106.14 v1(380,2106.14) 380,2130.08 378.99,2131.09 378.99,2132.15 360,2151.14 R29.1 ; v1(570,2086.14) 592.99,2086.14 600.39,2078.74 J11.6
RXD1: IC6.10 J11.5 R30.1 | length 1102.2
  Top w6: v1(353.37,2124.98) 353.37,2106.12 372.2,2087.3 387.8,2087.3 396.65,2096.14 456.38,2096.14 457.22,2095.3 482.78,2095.3 483.62,2096.14 540,2096.14 551.16,2084.98 551.16,2078.34 v1(570,2059.49) ; v1(545,1771.14) 545,1802.79 572,1829.79 572,1868.14 590,1886.14 v1(590,1916.14) ; v1(620,1741.14) 642.64,1763.78 J11.5
  Bot w6: IC6.10 259.84,2082.68 302.15,2124.98 v1(353.37,2124.98) ; v1(545,1771.14) 555,1771.14 565,1761.14 600,1761.14 v1(620,1741.14) 620,1705.59 R30.1 ; v1(570,2059.49) 595.74,2059.49 640.61,2014.62 640.61,1977.66 615.84,1952.89 615.84,1941.98 v1(590,1916.14)
TX_EN: IC6.21 J11.8 | length 390.6
  Bot w6: IC6.21 441.65,1866.14 471.98,1835.8 471.98,1833.34 483.02,1822.3 499.49,1822.3 509.67,1832.47 509.67,1837.74 547.22,1875.3 606.13,1875.3 642,1911.17 642,1918.14 645.12,1921.26 J11.8
TXD0: IC6.22 J11.7 | length 431.7
  Top w6: v1(435,1846.14) 440,1846.14 495,1901.14 v1(525,1901.14)
  Bot w6: IC6.22 405.83,1846.14 v1(435,1846.14) ; v1(525,1901.14) 528.84,1897.3 542.2,1897.3 552.2,1887.3 601.16,1887.3 630,1916.14 630,1946.06 656.62,1972.69 656.62,2000 J11.7
TXD1: IC6.23 J11.10 | length 375.2
  Bot w6: IC6.23 434.37,1826.77 434.37,1821.25 433.91,1820.8 433.91,1805.19 444.95,1794.15 469.03,1794.15 473.18,1798.3 509.43,1798.3 519.07,1807.94 594.85,1807.94 636.3,1766.48 636.3,1763.78 J11.10
U1_CTS: J7.6 J8.6 | length 570.9
  Bot w6: J7.6 J8.6
U1_RTS: J7.4 J8.4 | length 612.1
  Top w6: J7.4 222.25,2413.39 250,2441.14 v1(250,2451.14) ; v1(560,2456.14) 620,2456.14 662.76,2413.38 J8.4
  Bot w6: v1(250,2451.14) 555,2451.14 v1(560,2456.14)
U1_RXD: J7.3 J8.3 | length 586.6
  Top w6: J7.3 240.99,2492.13 v1(260,2511.14) ; v1(600,2511.14) 619.02,2492.12 J8.3
  Bot w6: v1(260,2511.14) v1(600,2511.14)
U1_TXD: J7.5 J8.5 | length 581.3
  Top w6: J7.5 258.51,2334.65 v1(260,2336.14) ; v1(615.55,2347.24) 715.75,2347.24 J8.5
  Bot w6: v1(260,2336.14) 271.1,2347.24 v1(615.55,2347.24)
VDCR: C25.1 C26.2 IC6.6 | length 189.9
  Bot w6: C25.1 82.68,1921.26 108,1921.26 C26.2@145.67,1883.59 ; C26.2 C26.2@145.67,1883.59 ; IC6.6 167.32,1905.51 145.67,1883.86 C26.2@145.67,1883.59
pads on no net: IC6.4 IC6.14 IC6.15 IC6.18 IC6.20 J7.8 J7.10 J10.1 J10.2 J10.7 J10.9 J93.MH1 J93.MH2

## Polygon pours and split planes (outlines as drawn)
GND on Top "Signal Layer 1-No Net 1" (solid, remove dead copper, pour order 0): 0,2866.14 9.84,2875.98 885.83,2875.98 883.66,2873.82 883.66,1419.29 885.83,1417.12 885.83,681.1 0,681.1

## Keep-outs
Top:
  lines w3.94: 0,51.18 885.83,51.18 ; 0,2826.77 885.83,2826.77 ; 236.22,2374.01 236.22,2383.86 ; 236.22,2531.49 236.22,2541.34 ; 236.22,2610.23 236.22,2620.08 ; 639.76,2521.65 639.76,2541.34 ; 649.61,1793.31 649.61,1812.99 ; 649.61,1872.05 649.61,1891.73 ; 649.61,1950.79 649.61,1970.47 ; 649.61,2039.37 649.61,2049.21 ; 649.61,2364.17 649.61,2374.01 ; 649.61,2442.91 649.61,2462.6 ; 757.17,1158.81 694.25,1158.81 629.92,1094.49 629.92,897.64 492.13,759.84 423.23,759.84 383.86,799.21 383.86,907.48 403.54,927.16 403.54,1188.78 403.54,1295.06 431.45,1322.96 437.51,1322.96 437.51,1408.65 467.83,1438.97 797.24,1438.97 846.46,1389.76 846.46,1370.08
Bot:
  lines w3.94: 0,110.24 885.83,110.24 ; 0,2748.03 885.83,2748.03
KeepOutLayer:
  lines w3.94: 118.11,2295.27 0,2295.27 0,572.83 246.06,572.83 ; 246.06,179.13 244.1,177.17 0,177.17 0,1.97 885.83,1.97 885.83,1714.57 649.61,1714.57 ; 383.86,799.21 383.86,907.48 403.54,927.16 403.54,1297.12 429.38,1322.96 437.51,1322.96 ; 629.92,897.64 629.92,1094.49 693.04,1157.61 748.03,1157.61 752.1,1157.61 846.46,1251.97 846.46,1389.76 807.09,1429.13 ; 639.76,2088.58 639.76,2108.27 649.61,2118.11 885.83,2118.11 885.83,2285.43 748.03,2285.43 ; 669.29,2688.97 885.83,2688.97 885.83,2866.14 0,2866.14 ; 0,2866.14 0,2688.98 59.05,2688.98 226.38,2688.98 ; 0,2866.14 0,2866.14 ; 226.38,2688.98 226.38,2688.97

## Silkscreen, mask and mechanical layers (free items; w line width, h text height)
TopOverlay:
  lines w7.87: 303.15,307.09 259.84,350.39 303.15,393.7
  text "Ethernet PHY" at 98.43,2173.23 h59.06
  text "for ESP32" at 70.87,2086.61 h59.06
  text "v1.0" at 285.43,1980.31 h60
  text "POE" at 385.83,275.59 h59.06 r90
Mechanical1:
  lines w10: 0,177.17 59.05,177.17 ; 0,177.17 59.05,177.17 ; 0,177.17 0,0 885.83,0 885.83,1724.41 826.77,1724.41 826.77,1937.01 822.83,1940.94 814.96,1948.82 704.72,1948.82 704.72,1972.44 811.02,1972.44 826.77,1988.19 826.77,2118.11 885.83,2118.11 885.83,2295.27 826.77,2295.27 826.77,2519.68 ; 59.05,177.17 59.05,385.83 74.8,401.58 181.1,401.58 181.1,425.2 74.8,425.2 59.05,440.95 59.05,570.87 0,570.87 0,1724.41 0,2295.27 59.05,2295.27 59.05,2519.68 177.17,2519.68 177.17,2543.31 59.05,2543.31 59.05,2688.97 0,2688.97 0,2866.14 885.83,2866.14 885.83,2688.97 826.77,2688.97 826.77,2543.31 704.72,2543.31 704.72,2519.69 826.77,2519.69 ; 826.77,2519.68 826.77,2519.69

## Text inside footprints (layer, text, board x,y; h text height)
J7: BottomOverlay "6" at 285.43,2665.36 h47.24 r180; BottomOverlay "10" at 273.62,2351.18 h47.24 r180; TopOverlay "1" at 280.51,2618.11 h47.24; TopOverlay "5" at 268.7,2303.94 h47.24
J8: BottomOverlay "10" at 555.12,2358.27 h47.24 r180; BottomOverlay "6" at 596.46,2672.44 h47.24 r180; TopOverlay "5" at 589.57,2311.02 h47.24; TopOverlay "1" at 601.38,2625.2 h47.24
J10: BottomOverlay "6" at 285.44,547.24 h47.24 r180; BottomOverlay "10" at 273.62,233.07 h47.24 r180; TopOverlay "1" at 280.51,500 h47.24; TopOverlay "5" at 268.7,185.83 h47.24
J11: BottomOverlay "10" at 555.12,1787.4 h47.24 r180; BottomOverlay "6" at 596.46,2101.57 h47.24 r180; TopOverlay "5" at 589.57,1740.16 h47.24; TopOverlay "1" at 601.38,2054.33 h47.24